# Altium PCB pcb_full_revD.PcbDoc (part 2 of 2)
Units mm, origin at the board's own origin, x right, y up, seen from the top; angles counter-clockwise.
Board outline 49.62 x 32.2 mm, 2 copper layers (Top Layer, Bottom Layer); 45 components, 51 nets, 180 pads, 111 vias.
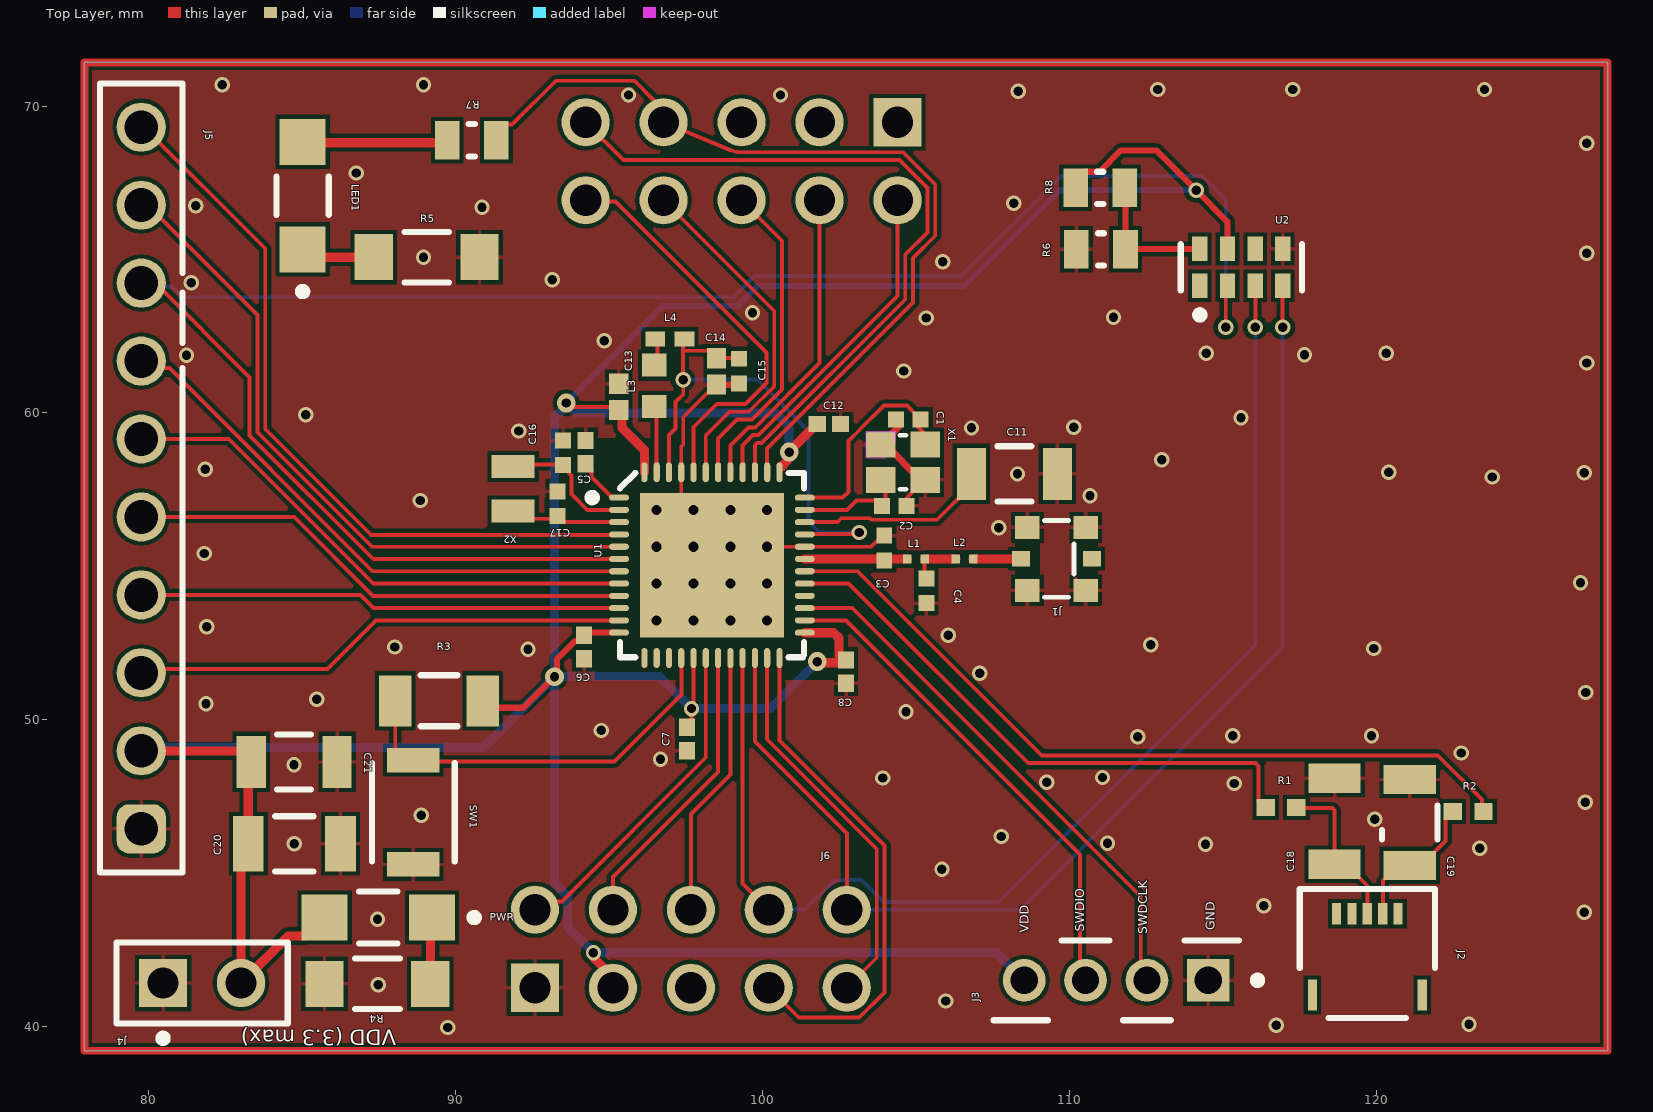
[diagram p0: Top Layer view]

## Silkscreen, mask and mechanical layers (free items; w line width, h text height) (continued)
Drill Drawing: (continued)
  text "Top Layer - Bottom Layer" at 78.779,80.899 h0.65
  text "Via" at 95.237,80.899 h0.65
  text "Rounded" at 102.064,80.899 h0.65
  text "(Mixed)" at 110.571,80.899 h0.65
  text "147 Total" at 45.466,79.282 h0.65